# EAGLE board alimentation (EAGLE 7.6.0)
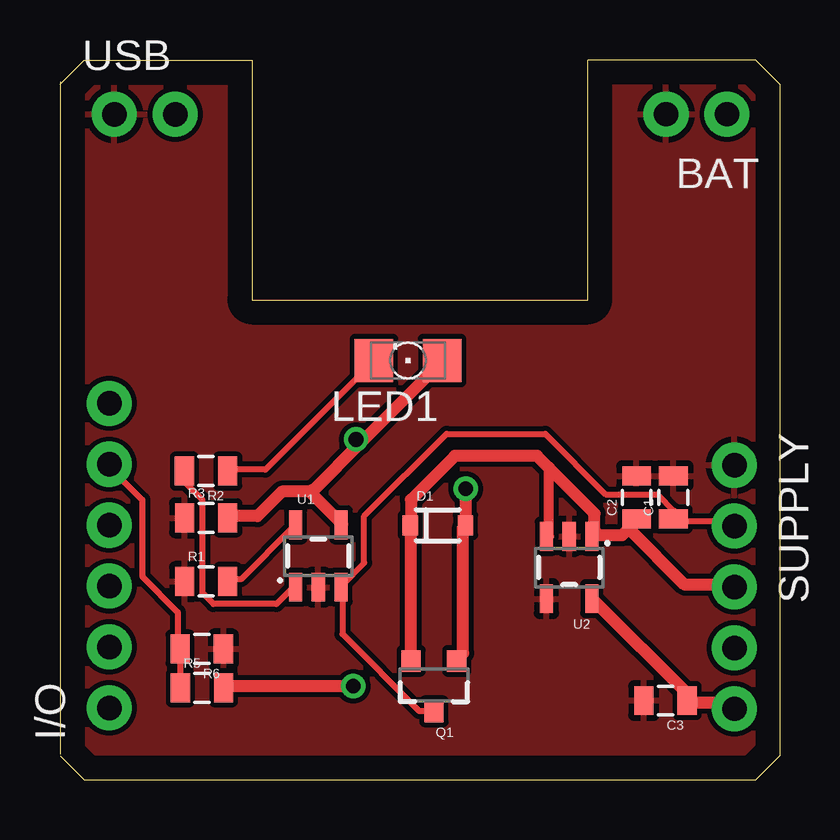
[diagram p0: board, top side]
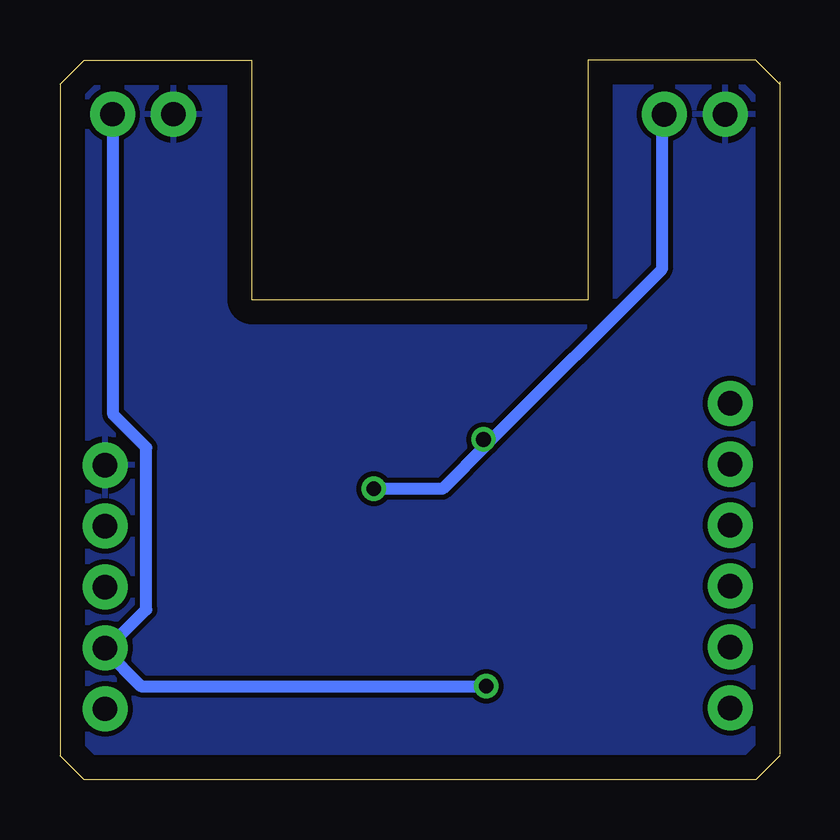
[diagram p1: board, bottom side, seen from below]

Size 30 x 30 mm. Coordinates in mm from the lower left corner, seen from the top.
Outline: 0,29.09 0,29
Outline: 0,29 0,1.05
Outline: 0,29 1,30 8,30 8,20 22,20 22,30 29,30 30,29 30,1 29,0 1,0 0,1
Copper layers (1*16): Top 0.035mm / dielectric 1.5mm / Bottom 0.035mm
Design rules "default": minimum track width 10mil, minimum drill 24mil, track to track 8mil, track to pad 8mil, pad to pad 8mil, via to via 8mil, smd to smd 8mil, copper to edge 40mil, drill to drill 8mil, minimum pad ring 10mil, minimum via ring 8mil, stop-mask expansion 4mil, vias tented up to drill 0mil, thermal gap 10mil
Net classes: 1 SUPPLY: width 0.5 mm, drill 0.2 mm, clearance 0.5 mm

## Footprints (pad centres in the part's own frame; a part is rotated, then mirrored left to right if it is on the bottom)
1X02_NO_SILK = drill 1.016 pad 1.88: 1 0,0; 2 2.54,0
0805 = smd 0.8 x 1.2: 1 -0.9,0; 2 0.9,0
SOD-323 = smd 0.63 x 0.83: A 1.15,0; C -1.15,0
1X06_NO_SILK = drill 1.016 pad 1.88: 1 0,0; 2 2.54,0; 3 5.08,0; 4 7.62,0; 5 10.16,0; 6 12.7,0
LED_1206 = smd 1.6 x 1.803: A -1.422,0; C 1.422,0
SOT23-3 = smd 0.8 x 0.9: 1 -0.95,-1; 2 0.95,-1; 3 0,1.1
1X05_NO_SILK = drill 1.016 pad 1.88: 1 0,0; 2 2.54,0; 3 5.08,0; 4 7.62,0; 5 10.16,0
SOT23-5 = smd 0.55 x 1.2: 1 -0.95,-1.3; 2 0,-1.3; 3 0.95,-1.3; 4 0.95,1.3; 5 -0.95,1.3

## Placement (x,y rotation side)
BAT  BAT  [1X02_NO_SILK]  27.81,27.74 180 top
C1  4.7 uF  [0805]  25.57,11.76 90 top
C2  1 uF  [0805]  24.04,11.76 90 top
C3  2.2 uF  [0805]  25.24,3.29 180 top
D1  BAT20J  [SOD-323]  15.76,10.6 0 top
I/O  I/O  [1X06_NO_SILK]  2.06,2.99 90 top
LED1  JAUNE  [LED_1206]  14.51,17.47 180 top
Q1  2.5A/30V  [SOT23-3]  15.59,3.95 180 top
R1  4.7K  [0805]  6.09,8.26 0 top
R2  200  [0805]  6.09,12.86 180 top
R3  10K  [0805]  6.1,10.91 0 top
R5  2K  [0805]  5.92,3.82 0 top
R6  2K  [0805]  5.91,5.45 180 top
SUPPLY  SUPPLY  [1X05_NO_SILK]  28.12,13.11 270 top
U1  MCP73831  [SOT23-5]  10.77,9.32 0 top
U2  3.3V  [SOT23-5]  21.23,8.84 180 top
USB  USB  [1X02_NO_SILK]  2.27,27.74 0 top

## Library data of the parts
BAT SUPPLY USB = SparkFun-Connectors
C1-C3 = SparkFun-Capacitors
D1 = SparkFun-DiscreteSemi; PROD_ID: DIO-11623
I/O = SparkFun-Connectors; PROD_ID: CONN-08437
LED1 = eagle-ltspice; SPICEMODEL: NONE; SPICEPREFIX: D; SPICETYPE: diode
Q1 = SparkFun-DiscreteSemi; PROD_ID: TRANS-11308
R1-R3 R5 R6 = SparkFun-Passives
U1 = SparkFun-PowerIC; PROD_ID: IC-09995
U2 = SparkFun-PowerIC; PROD_ID: VREG-12457

## Nets
GND: BAT.2 C1.2 C2.2 C3.2 R1.1 R3.1 R6.1 SUPPLY.1 U1.2 U2.2 U2.4 USB.1
N$1: LED1.C R2.1
N$2: R1.2 U1.5
N$4: R2.2 U1.1
V_BAT_MESURE: I/O.5 R5.1 R6.2
V_BATT [SUPPLY]: BAT.1 R5.2 SUPPLY.4
VCC [SUPPLY]: C3.1 SUPPLY.5 U2.5
VCC_2: C1.1 Q1.3 SUPPLY.2 U1.3
VIN [SUPPLY]: C2.1 D1.C Q1.2 SUPPLY.3 U2.1 U2.3
VUSB [SUPPLY]: D1.A LED1.A Q1.1 R3.2 U1.4 USB.2

## Tracks (layer width: path | path; a pad name or v marks a point on that pad's centre or on a via)
GND
  pour Bottom (isolate 0.2): 1,30 0,29 0,1 1,0 29,0 30,1 30,29 29,30 22,30 22,20 8,20 8,30
  pour Top (isolate 0.2): 1,30 0,29 0,1 1,0 29,0 30,1 30,29 29,30 22,30 22,20 8,20 8,30
N$1
  Top 0.254: R2.1 7.09,12.92 8.57,12.92 13.03,17.38 LED1.C
N$2
  Top 0.254: R1.2 7.09,8.35 7.54,8.35 9.72,10.52 U1.5
N$4
  Top 0.254: R2.2 5.26,12.81 5.26,12.35 5.94,11.66 5.94,7.78 6.4,7.32 9.03,7.32 9.72,8.01 U1.1
V_BAT_MESURE
  Top 0.254: R5.1 5.03,3.89 5.03,5.38 R6.2 4.92,5.49 4.92,6.98 3.43,8.47 3.43,11.66 2.06,13.04 I/O.5
V_BATT  (via drill 0.61)
  Top 0.5: v12.23,3.89 6.86,3.89 R5.2
  Bottom 0.5: v12.23,3.89 26.63,3.89 28.12,5.38 SUPPLY.4 27.89,5.61 26.4,7.09 26.4,13.84 27.77,15.21 27.77,27.67 BAT.1
VCC
  Top 0.5: SUPPLY.5 28.12,2.98 27.89,3.21 26.18,3.21 C3.1 26.18,3.55 22.29,7.44 U2.5
VCC_2
  Top 0.254: SUPPLY.2 28.12,10.64 28,10.75 25.6,10.75 C1.1 25.6,10.98 25.6,11.21 24.92,11.89 22.75,11.89 20.23,14.41 16.12,14.41 12.69,10.98 12.69,9.04 11.77,8.12 U1.3 11.77,8.01 11.77,6.06 14.97,2.86 15.54,2.86 Q1.3
VIN
  Top 0.406: U2.3 20.39,10.14 20.39,12.99
  Top 0.5: Q1.2 14.63,5.04 14.63,10.52 D1.C 14.63,10.87 14.63,11.66 16.46,13.49 19.89,13.49 20.39,12.99 22.29,11.09 22.29,10.41 U2.1 22.29,10.18 23.43,10.18 23.72,10.47 | 23.72,10.47 24,10.75 C2.1 | 23.72,10.47 26.06,8.12 28.12,8.12 SUPPLY.3
VUSB  (via drill 0.61)
  Top 0.5: 10.4,12.01 9.26,12.01 8.23,10.98 7.09,10.98 R3.2 | 10.4,12.01 11.77,10.64 U1.4 | 12.52,14.01 10.63,12.12 10.4,12.01 | 12.52,14.01 15.89,17.38 LED1.A | Q1.1 16.57,5.04 16.8,5.26 16.8,10.52 D1.A 16.92,10.75 v16.92,12.12 | v12.34,14.18 12.52,14.01
  Bottom 0.5: v16.92,12.12 14.06,12.12 12.17,14.01 | 12.17,14.01 4.92,21.27 4.92,27.67 USB.2 | v12.34,14.18 12.17,14.01